# EAGLE board Q_Spec_Triad (EAGLE 7.7.0), part 1 of 2
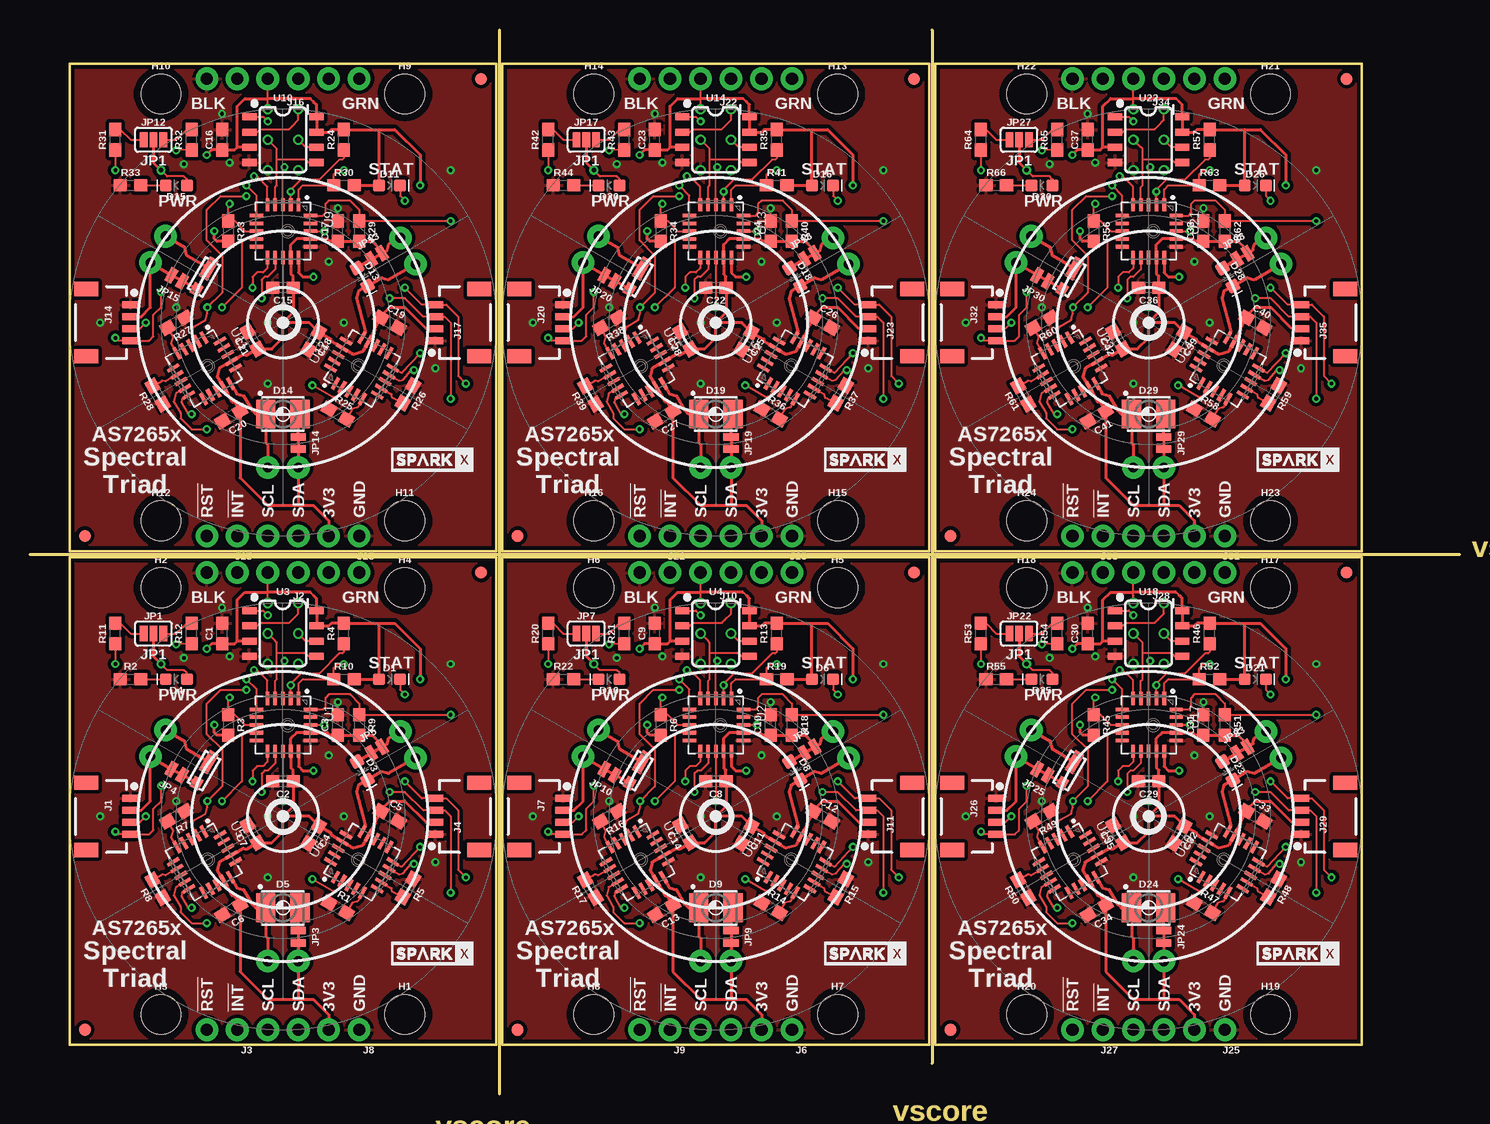
[diagram p0: board, top side]
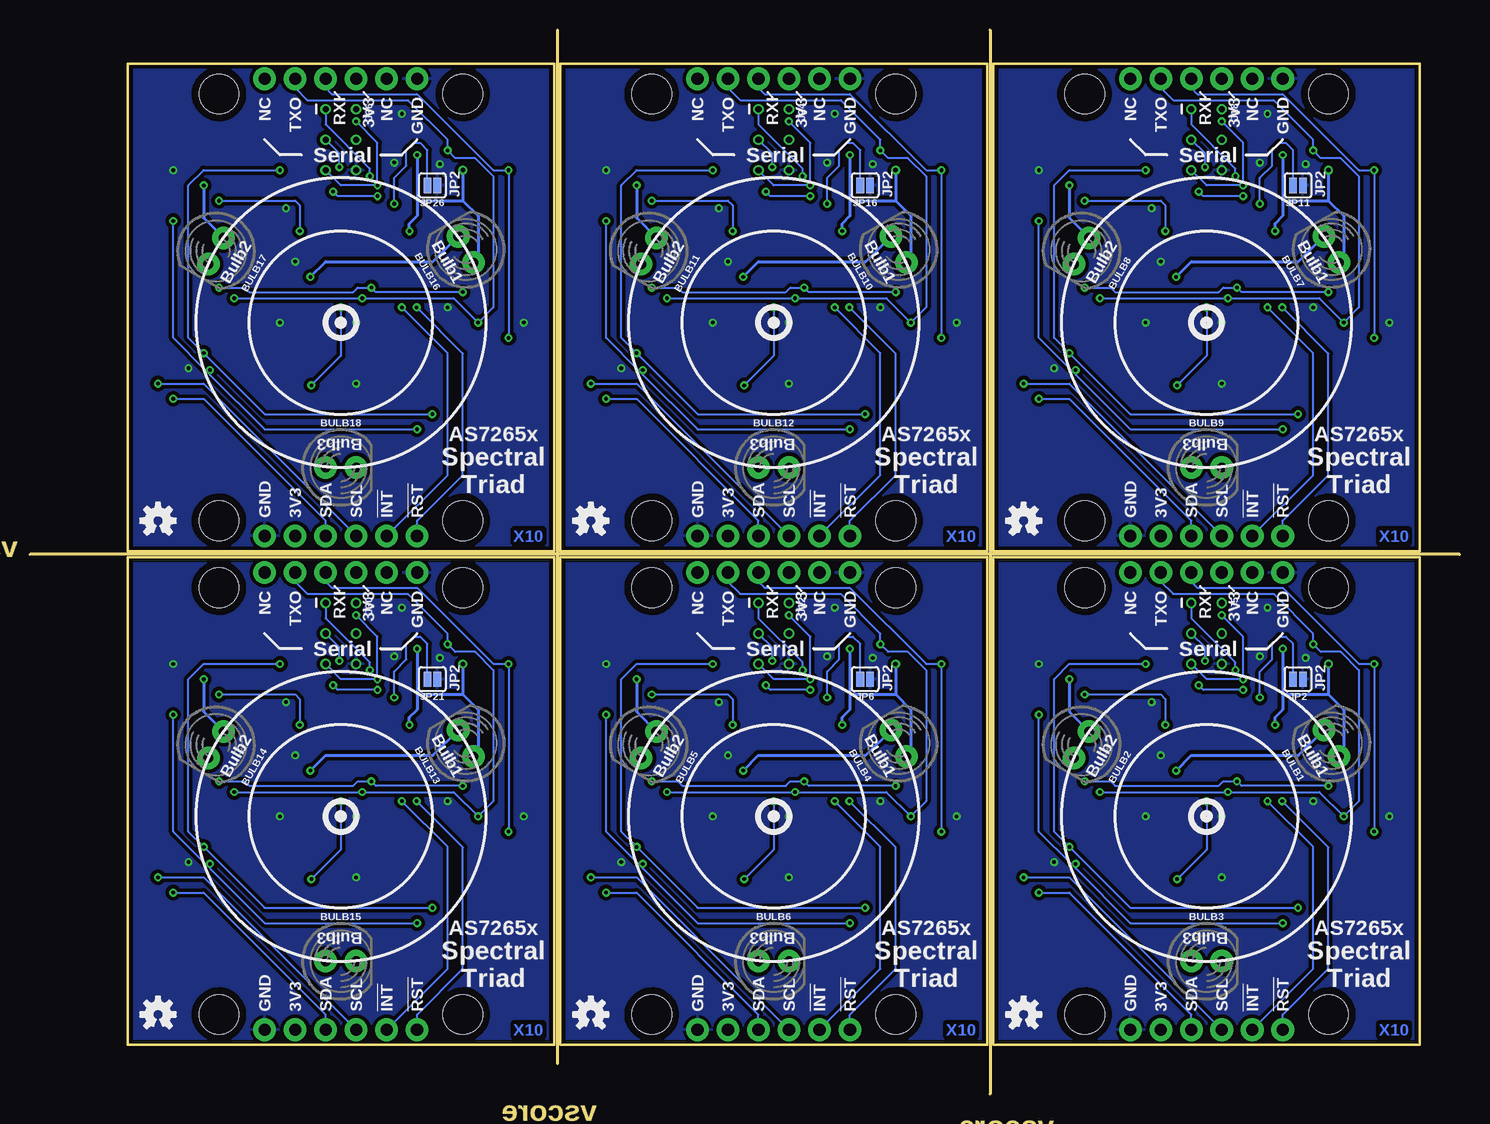
[diagram p1: board, bottom side, seen from below]

Size 119.13 x 88.65 mm. Coordinates in mm from the lower left corner, seen from the top.
Outline: 0,44.96 119.13,44.96
Outline: 75.18,88.65 75.18,2.54
Outline: 39.12,88.65 39.12,0
Outline: 3.3,4.06 3.3,44.7 38.86,44.7 38.86,4.06 3.3,4.06
Outline: 39.37,4.06 39.37,44.7 74.93,44.7 74.93,4.06 39.37,4.06
Outline: 3.3,45.21 3.3,85.85 38.86,85.85 38.86,45.21 3.3,45.21
Outline: 39.37,45.21 39.37,85.85 74.93,85.85 74.93,45.21 39.37,45.21
Outline: 75.44,4.06 75.44,44.7 111,44.7 111,4.06 75.44,4.06
Outline: 75.44,45.21 75.44,85.85 111,85.85 111,45.21 75.44,45.21
Copper layers (1*16): Top 0.035mm / dielectric 1.5mm / Bottom 0.035mm
Design rules "SparkFun-2-layer-PCBWay-LIMIT *": minimum track width 6mil, minimum drill 12mil, track to track 6mil, track to pad 6mil, pad to pad 6mil, via to via 6mil, smd to smd 6mil, copper to edge 6mil, drill to drill 6mil, minimum pad ring 7mil, minimum via ring 7mil, stop-mask expansion 4mil, vias tented up to drill 25mil, thermal gap 10mil

## Footprints (pad centres in the part's own frame; a part is rotated, then mirrored left to right if it is on the bottom)
LED_5MM_NOSILK = drill 0.813 pad 1.88: A -1.27,0; K 1.27,0
0603 = smd 1.1 x 1: 1 -0.85,0; 2 0.85,0
LED-0603 = smd 1 x 1: A -0.877,0; C 0.877,0
SUPER_BRIGHT_SMD_LED_1206 = smd 1 x 0.8: A -1.2,0 | smd 1.9 x 0.8: C 0.827,0
PLCC-2 = smd 1.6 x 2.4: 1 1.425,0; 2 -1.425,0
FIDUCIAL-1X2 = smd 1 x 1: 1 0,0
STAND-OFF = hole 3.302: 0,0
1X04_1MM_RA = smd 0.6 x 1.35: 1 -1.5,0; 2 -0.5,0; 3 0.5,0; 4 1.5,0 | smd 1.2 x 2: NC1 2.8,-3.675; NC2 -2.8,-3.675
1X06_NO_SILK = drill 1.016 pad 1.88: 1 0,0; 2 2.54,0; 3 5.08,0; 4 7.62,0; 5 10.16,0; 6 12.7,0
1X02_NO_SILK = drill 1.016 pad 1.88: 1 0,0; 2 2.54,0
2X3_TEST_POINTS = drill 0.508: 1 -2.54,-1.27; 2 -2.54,1.27; 3 0,-1.27; 4 0,1.27; 5 2.54,-1.27; 6 2.54,1.27
1X04_NO_SILK = drill 1.016 pad 1.88: 1 0,0; 2 2.54,0; 3 5.08,0; 4 7.62,0
SMT-JUMPER_3_2-NC_PASTE_SILK = smd 0.635 x 1.27: 1 -0.813,0; 2 0,0; 3 0.813,0
SMT-JUMPER_2_NO_SILK = smd 0.635 x 1.27: 1 -0.406,0; 2 0.406,0
SMT-JUMPER_2_NC_TRACE_NO-SILK = smd 0.635 x 1.27: 1 -0.508,0; 2 0.508,0
LGA20 = smd 1.1 x 0.3: 1 -2.2,1.3; 2 -2.2,0.65; 3 -2.2,0; 4 -2.2,-0.65; 5 -2.2,-1.3; 11 2.2,-1.3; 12 2.2,-0.65; 13 2.2,0; 14 2.2,0.65; 15 2.2,1.3 | smd 0.3 x 1.1: 6 -1.3,-2.2; 7 -0.65,-2.2; 8 0,-2.2; 9 0.65,-2.2; 10 1.3,-2.2; 16 1.3,2.3; 17 0.65,2.3; 18 0,2.3; 19 -0.65,2.3; 20 -1.3,2.3
SO08 = smd 0.6 x 1.2: 1 -1.905,-2.8; 2 -0.635,-2.8; 3 0.635,-2.8; 4 1.905,-2.8; 5 1.905,2.8; 6 0.635,2.8; 7 -0.635,2.8; 8 -1.905,2.8

## Placement (x,y rotation side)
BULB1  Incandescent  [LED_5MM_NOSILK]  10.67,29.21 120 bottom
BULB2  Incandescent  [LED_5MM_NOSILK]  31.5,29.08 240 bottom
BULB3  Incandescent  [LED_5MM_NOSILK]  21.08,11.05 0 bottom
BULB4  Incandescent  [LED_5MM_NOSILK]  46.74,29.21 120 bottom
BULB5  Incandescent  [LED_5MM_NOSILK]  67.56,29.08 240 bottom
BULB6  Incandescent  [LED_5MM_NOSILK]  57.15,11.05 0 bottom
BULB7  Incandescent  [LED_5MM_NOSILK]  10.67,70.36 120 bottom
BULB8  Incandescent  [LED_5MM_NOSILK]  31.5,70.23 240 bottom
BULB9  Incandescent  [LED_5MM_NOSILK]  21.08,52.2 0 bottom
BULB10  Incandescent  [LED_5MM_NOSILK]  46.74,70.36 120 bottom
BULB11  Incandescent  [LED_5MM_NOSILK]  67.56,70.23 240 bottom
BULB12  Incandescent  [LED_5MM_NOSILK]  57.15,52.2 0 bottom
BULB13  Incandescent  [LED_5MM_NOSILK]  82.8,29.21 120 bottom
BULB14  Incandescent  [LED_5MM_NOSILK]  103.63,29.08 240 bottom
BULB15  Incandescent  [LED_5MM_NOSILK]  93.22,11.05 0 bottom
BULB16  Incandescent  [LED_5MM_NOSILK]  82.8,70.36 120 bottom
BULB17  Incandescent  [LED_5MM_NOSILK]  103.63,70.23 240 bottom
BULB18  Incandescent  [LED_5MM_NOSILK]  93.22,52.2 0 bottom
C1  1.0uF  [0603]  16,38.35 90 top
C2  0.1uF  [0603]  21.08,26.03 180 top
C3  10uF  [0603]  25.65,30.73 90 top
C4  0.1uF  [0603]  23.62,21.59 240 top
C5  10uF  [0603]  29.97,23.11 330 top
C6  0.1uF  [0603]  16.77,15.32 210 top
C7  10uF  [0603]  18.55,21.65 120 top
C8  0.1uF  [0603]  57.15,26.03 180 top
C9  1.0uF  [0603]  52.07,38.35 90 top
C10  10uF  [0603]  61.72,30.73 90 top
C11  0.1uF  [0603]  59.69,21.59 240 top
C12  10uF  [0603]  66.04,23.11 330 top
C13  0.1uF  [0603]  52.84,15.32 210 top
C14  10uF  [0603]  54.62,21.65 120 top
C15  0.1uF  [0603]  21.08,67.18 180 top
C16  1.0uF  [0603]  16,79.5 90 top
C17  10uF  [0603]  25.65,71.88 90 top
C18  0.1uF  [0603]  23.62,62.74 240 top
C19  10uF  [0603]  29.97,64.26 330 top
C20  0.1uF  [0603]  16.77,56.47 210 top
C21  10uF  [0603]  18.55,62.8 120 top
C22  0.1uF  [0603]  57.15,67.18 180 top
C23  1.0uF  [0603]  52.07,79.5 90 top
C24  10uF  [0603]  61.72,71.88 90 top
C25  0.1uF  [0603]  59.69,62.74 240 top
C26  10uF  [0603]  66.04,64.26 330 top
C27  0.1uF  [0603]  52.84,56.47 210 top
C28  10uF  [0603]  54.62,62.8 120 top
C29  0.1uF  [0603]  93.22,26.03 180 top
C30  1.0uF  [0603]  88.14,38.35 90 top
C31  10uF  [0603]  97.79,30.73 90 top
C32  0.1uF  [0603]  95.76,21.59 240 top
C33  10uF  [0603]  102.11,23.11 330 top
C34  0.1uF  [0603]  88.91,15.32 210 top
C35  10uF  [0603]  90.69,21.65 120 top
C36  0.1uF  [0603]  93.22,67.18 180 top
C37  1.0uF  [0603]  88.14,79.5 90 top
C38  10uF  [0603]  97.79,71.88 90 top
C39  0.1uF  [0603]  95.76,62.74 240 top
C40  10uF  [0603]  102.11,64.26 330 top
C41  0.1uF  [0603]  88.91,56.47 210 top
C42  10uF  [0603]  90.69,62.8 120 top
D1  BLUE  [LED-0603]  29.97,34.54 0 top
D2  5700k  [SUPER_BRIGHT_SMD_LED_1206]  14.48,26.92 60 top
D3  IR  [LED-0603]  27.68,26.92 300 top
D4  RED  [LED-0603]  12.19,34.54 180 top
D5  UV  [PLCC-2]  21.08,15.49 0 top
D6  BLUE  [LED-0603]  66.04,34.54 0 top
D7  5700k  [SUPER_BRIGHT_SMD_LED_1206]  50.55,26.92 60 top
D8  IR  [LED-0603]  63.75,26.92 300 top
D9  UV  [PLCC-2]  57.15,15.49 0 top
D10  RED  [LED-0603]  48.26,34.54 180 top
D11  BLUE  [LED-0603]  29.97,75.69 0 top
D12  5700k  [SUPER_BRIGHT_SMD_LED_1206]  14.48,68.07 60 top
D13  IR  [LED-0603]  27.68,68.07 300 top
D14  UV  [PLCC-2]  21.08,56.64 0 top
D15  RED  [LED-0603]  12.19,75.69 180 top
D16  BLUE  [LED-0603]  66.04,75.69 0 top
D17  5700k  [SUPER_BRIGHT_SMD_LED_1206]  50.55,68.07 60 top
D18  IR  [LED-0603]  63.75,68.07 300 top
D19  UV  [PLCC-2]  57.15,56.64 0 top
D20  RED  [LED-0603]  48.26,75.69 180 top
D21  BLUE  [LED-0603]  102.11,34.54 0 top
D22  5700k  [SUPER_BRIGHT_SMD_LED_1206]  86.62,26.92 60 top
D23  IR  [LED-0603]  99.82,26.92 300 top
D24  UV  [PLCC-2]  93.22,15.49 0 top
D25  RED  [LED-0603]  84.33,34.54 180 top
D26  BLUE  [LED-0603]  102.11,75.69 0 top
D27  5700k  [SUPER_BRIGHT_SMD_LED_1206]  86.62,68.07 60 top
D28  IR  [LED-0603]  99.82,68.07 300 top
D29  UV  [PLCC-2]  93.22,56.64 0 top
D30  RED  [LED-0603]  84.33,75.69 180 top
FD1  FIDUCIAL1X2  [FIDUCIAL-1X2]  4.57,5.33 0 top
FD2  FIDUCIAL1X2  [FIDUCIAL-1X2]  37.59,43.43 0 top
FD3  FIDUCIAL1X2  [FIDUCIAL-1X2]  40.64,5.33 0 top
FD4  FIDUCIAL1X2  [FIDUCIAL-1X2]  73.66,43.43 0 top
FD5  FIDUCIAL1X2  [FIDUCIAL-1X2]  4.57,46.48 0 top
FD6  FIDUCIAL1X2  [FIDUCIAL-1X2]  37.59,84.58 0 top
FD7  FIDUCIAL1X2  [FIDUCIAL-1X2]  40.64,46.48 0 top
FD8  FIDUCIAL1X2  [FIDUCIAL-1X2]  73.66,84.58 0 top
FD9  FIDUCIAL1X2  [FIDUCIAL-1X2]  76.71,5.33 0 top
FD10  FIDUCIAL1X2  [FIDUCIAL-1X2]  109.73,43.43 0 top
FD11  FIDUCIAL1X2  [FIDUCIAL-1X2]  76.71,46.48 0 top
FD12  FIDUCIAL1X2  [FIDUCIAL-1X2]  109.73,84.58 0 top
H1  STAND-OFF  [STAND-OFF]  31.24,6.6 0 top
H2  STAND-OFF  [STAND-OFF]  10.92,42.16 0 top
H3  STAND-OFF  [STAND-OFF]  10.92,6.6 0 top
H4  STAND-OFF  [STAND-OFF]  31.24,42.16 0 top
H5  STAND-OFF  [STAND-OFF]  67.31,42.16 0 top
H6  STAND-OFF  [STAND-OFF]  46.99,42.16 0 top
H7  STAND-OFF  [STAND-OFF]  67.31,6.6 0 top
H8  STAND-OFF  [STAND-OFF]  46.99,6.6 0 top
H9  STAND-OFF  [STAND-OFF]  31.24,83.31 0 top
H10  STAND-OFF  [STAND-OFF]  10.92,83.31 0 top
H11  STAND-OFF  [STAND-OFF]  31.24,47.75 0 top
H12  STAND-OFF  [STAND-OFF]  10.92,47.75 0 top
H13  STAND-OFF  [STAND-OFF]  67.31,83.31 0 top
H14  STAND-OFF  [STAND-OFF]  46.99,83.31 0 top
H15  STAND-OFF  [STAND-OFF]  67.31,47.75 0 top
H16  STAND-OFF  [STAND-OFF]  46.99,47.75 0 top
H17  STAND-OFF  [STAND-OFF]  103.38,42.16 0 top
H18  STAND-OFF  [STAND-OFF]  83.06,42.16 0 top
H19  STAND-OFF  [STAND-OFF]  103.38,6.6 0 top
H20  STAND-OFF  [STAND-OFF]  83.06,6.6 0 top
H21  STAND-OFF  [STAND-OFF]  103.38,83.31 0 top
H22  STAND-OFF  [STAND-OFF]  83.06,83.31 0 top
H23  STAND-OFF  [STAND-OFF]  103.38,47.75 0 top
H24  STAND-OFF  [STAND-OFF]  83.06,47.75 0 top
J1  SMD  [1X04_1MM_RA]  8.38,23.11 270 top
J2  Serial Interface  [1X06_NO_SILK]  27.43,43.43 180 top
J3  [1X02_NO_SILK]  17.27,5.33 180 top
J4  SMD  [1X04_1MM_RA]  33.78,23.11 90 top
J5  Flash Programming  [2X3_TEST_POINTS]  21.08,38.35 270 bottom
J6  PTH  [1X04_NO_SILK]  63.5,5.33 180 top
J7  SMD  [1X04_1MM_RA]  44.45,23.11 270 top
J8  PTH  [1X04_NO_SILK]  27.43,5.33 180 top
J9  [1X02_NO_SILK]  53.34,5.33 180 top
J10  Serial Interface  [1X06_NO_SILK]  63.5,43.43 180 top
J11  SMD  [1X04_1MM_RA]  69.85,23.11 90 top
J12  Flash Programming  [2X3_TEST_POINTS]  57.15,38.35 270 bottom
J13  PTH  [1X04_NO_SILK]  27.43,46.48 180 top
J14  SMD  [1X04_1MM_RA]  8.38,64.26 270 top
J15  [1X02_NO_SILK]  17.27,46.48 180 top
J16  Serial Interface  [1X06_NO_SILK]  27.43,84.58 180 top
J17  SMD  [1X04_1MM_RA]  33.78,64.26 90 top
J18  Flash Programming  [2X3_TEST_POINTS]  21.08,79.5 270 bottom
J19  PTH  [1X04_NO_SILK]  63.5,46.48 180 top
J20  SMD  [1X04_1MM_RA]  44.45,64.26 270 top
J21  [1X02_NO_SILK]  53.34,46.48 180 top
J22  Serial Interface  [1X06_NO_SILK]  63.5,84.58 180 top
J23  SMD  [1X04_1MM_RA]  69.85,64.26 90 top
J24  Flash Programming  [2X3_TEST_POINTS]  57.15,79.5 270 bottom
J25  PTH  [1X04_NO_SILK]  99.57,5.33 180 top
J26  SMD  [1X04_1MM_RA]  80.52,23.11 270 top
J27  [1X02_NO_SILK]  89.41,5.33 180 top
J28  Serial Interface  [1X06_NO_SILK]  99.57,43.43 180 top
J29  SMD  [1X04_1MM_RA]  105.92,23.11 90 top
J30  Flash Programming  [2X3_TEST_POINTS]  93.22,38.35 270 bottom
J31  PTH  [1X04_NO_SILK]  99.57,46.48 180 top
J32  SMD  [1X04_1MM_RA]  80.52,64.26 270 top
J33  [1X02_NO_SILK]  89.41,46.48 180 top
J34  Serial Interface  [1X06_NO_SILK]  99.57,84.58 180 top
J35  SMD  [1X04_1MM_RA]  105.92,64.26 90 top
J36  Flash Programming  [2X3_TEST_POINTS]  93.22,79.5 270 bottom
JP1  [SMT-JUMPER_3_2-NC_PASTE_SILK]  10.29,38.35 0 top
JP2  [SMT-JUMPER_2_NO_SILK]  13.46,34.54 180 bottom
JP3  [SMT-JUMPER_2_NC_TRACE_NO-SILK]  22.35,13.08 270 top
JP4  [SMT-JUMPER_2_NC_TRACE_NO-SILK]  12.23,26.79 150 top
JP5  [SMT-JUMPER_2_NC_TRACE_NO-SILK]  28.89,28.65 30 top
JP6  [SMT-JUMPER_2_NO_SILK]  49.53,34.54 180 bottom
JP7  [SMT-JUMPER_3_2-NC_PASTE_SILK]  46.36,38.35 0 top
JP8  [SMT-JUMPER_2_NC_TRACE_NO-SILK]  64.95,28.65 30 top
JP9  [SMT-JUMPER_2_NC_TRACE_NO-SILK]  58.42,13.08 270 top
JP10  [SMT-JUMPER_2_NC_TRACE_NO-SILK]  48.3,26.79 150 top
JP11  [SMT-JUMPER_2_NO_SILK]  13.46,75.69 180 bottom
JP12  [SMT-JUMPER_3_2-NC_PASTE_SILK]  10.29,79.5 0 top
JP13  [SMT-JUMPER_2_NC_TRACE_NO-SILK]  28.89,69.79 30 top
JP14  [SMT-JUMPER_2_NC_TRACE_NO-SILK]  22.35,54.23 270 top
JP15  [SMT-JUMPER_2_NC_TRACE_NO-SILK]  12.23,67.94 150 top
JP16  [SMT-JUMPER_2_NO_SILK]  49.53,75.69 180 bottom
JP17  [SMT-JUMPER_3_2-NC_PASTE_SILK]  46.36,79.5 0 top
JP18  [SMT-JUMPER_2_NC_TRACE_NO-SILK]  64.95,69.79 30 top
JP19  [SMT-JUMPER_2_NC_TRACE_NO-SILK]  58.42,54.23 270 top
JP20  [SMT-JUMPER_2_NC_TRACE_NO-SILK]  48.3,67.94 150 top
JP21  [SMT-JUMPER_2_NO_SILK]  85.6,34.54 180 bottom
JP22  [SMT-JUMPER_3_2-NC_PASTE_SILK]  82.42,38.35 0 top
JP23  [SMT-JUMPER_2_NC_TRACE_NO-SILK]  101.02,28.65 30 top
JP24  [SMT-JUMPER_2_NC_TRACE_NO-SILK]  94.49,13.08 270 top
JP25  [SMT-JUMPER_2_NC_TRACE_NO-SILK]  84.37,26.79 150 top
JP26  [SMT-JUMPER_2_NO_SILK]  85.6,75.69 180 bottom
JP27  [SMT-JUMPER_3_2-NC_PASTE_SILK]  82.42,79.5 0 top
JP28  [SMT-JUMPER_2_NC_TRACE_NO-SILK]  101.02,69.79 30 top
JP29  [SMT-JUMPER_2_NC_TRACE_NO-SILK]  94.49,54.23 270 top
JP30  [SMT-JUMPER_2_NC_TRACE_NO-SILK]  84.37,67.94 150 top
LOGO1  OSHW-LOGOS  [OSHW-LOGO-S]  72.39,6.6 0 bottom
LOGO2  OSHW-LOGOS  [OSHW-LOGO-S]  36.32,47.75 0 bottom
LOGO3  OSHW-LOGOS  [OSHW-LOGO-S]  72.39,47.75 0 bottom
LOGO4  OSHW-LOGOS  [OSHW-LOGO-S]  36.32,6.6 0 bottom
LOGO5  OSHW-LOGOS  [OSHW-LOGO-S]  108.46,6.6 0 bottom
LOGO6  OSHW-LOGOS  [OSHW-LOGO-S]  108.46,47.75 0 bottom
R1  10k  [0603]  25.65,15.49 330 top
R2  1k  [0603]  8.38,34.54 0 top
R3  10k  [0603]  16.51,30.73 270 top
R4  10k  [0603]  26.16,38.35 90 top
R5  10k  [0603]  31.5,17.14 240 top
R6  10k  [0603]  52.58,30.73 270 top
R7  10k  [0603]  12.19,23.11 210 top
R8  10k  [0603]  10.63,17.08 120 top
R9  2.2k  [0603]  27.43,30.73 270 top
R10  2.2k  [0603]  26.16,34.54 0 top
R11  2.2k  [0603]  7.11,38.35 90 top
R12  2.2k  [0603]  13.46,38.35 90 top
R13  10k  [0603]  62.23,38.35 90 top
R14  10k  [0603]  61.72,15.49 330 top
R15  10k  [0603]  67.56,17.14 240 top
R16  10k  [0603]  48.26,23.11 210 top
R17  10k  [0603]  46.7,17.08 120 top
R18  2.2k  [0603]  63.5,30.73 270 top
R19  2.2k  [0603]  62.23,34.54 0 top
R20  2.2k  [0603]  43.18,38.35 90 top
R21  2.2k  [0603]  49.53,38.35 90 top
R22  1k  [0603]  44.45,34.54 0 top
R23  10k  [0603]  16.51,71.88 270 top
R24  10k  [0603]  26.16,79.5 90 top
R25  10k  [0603]  25.65,56.64 330 top
R26  10k  [0603]  31.5,58.29 240 top
R27  10k  [0603]  12.19,64.26 210 top
R28  10k  [0603]  10.63,58.23 120 top
R29  2.2k  [0603]  27.43,71.88 270 top
R30  2.2k  [0603]  26.16,75.69 0 top
R31  2.2k  [0603]  7.11,79.5 90 top
R32  2.2k  [0603]  13.46,79.5 90 top
R33  1k  [0603]  8.38,75.69 0 top
R34  10k  [0603]  52.58,71.88 270 top
R35  10k  [0603]  62.23,79.5 90 top
R36  10k  [0603]  61.72,56.64 330 top
R37  10k  [0603]  67.56,58.29 240 top
R38  10k  [0603]  48.26,64.26 210 top
R39  10k  [0603]  46.7,58.23 120 top
R40  2.2k  [0603]  63.5,71.88 270 top
R41  2.2k  [0603]  62.23,75.69 0 top
R42  2.2k  [0603]  43.18,79.5 90 top
R43  2.2k  [0603]  49.53,79.5 90 top
R44  1k  [0603]  44.45,75.69 0 top
R45  10k  [0603]  88.65,30.73 270 top
R46  10k  [0603]  98.3,38.35 90 top
R47  10k  [0603]  97.79,15.49 330 top
R48  10k  [0603]  103.63,17.14 240 top
R49  10k  [0603]  84.33,23.11 210 top
R50  10k  [0603]  82.77,17.08 120 top
R51  2.2k  [0603]  99.57,30.73 270 top
R52  2.2k  [0603]  98.3,34.54 0 top
R53  2.2k  [0603]  79.25,38.35 90 top
R54  2.2k  [0603]  85.6,38.35 90 top
R55  1k  [0603]  80.52,34.54 0 top
R56  10k  [0603]  88.65,71.88 270 top
R57  10k  [0603]  98.3,79.5 90 top
R58  10k  [0603]  97.79,56.64 330 top
R59  10k  [0603]  103.63,58.29 240 top
R60  10k  [0603]  84.33,64.26 210 top
R61  10k  [0603]  82.77,58.23 120 top
R62  2.2k  [0603]  99.57,71.88 270 top
R63  2.2k  [0603]  98.3,75.69 0 top
R64  2.2k  [0603]  79.25,79.5 90 top
R65  2.2k  [0603]  85.6,79.5 90 top
R66  1k  [0603]  80.52,75.69 0 top
U1  AS72651  [LGA20]  21.08,30.73 270 top
U2  AS72651  [LGA20]  57.15,30.73 270 top
U3  4MB Flash  [SO08]  21.08,38.35 270 top
U4  4MB Flash  [SO08]  57.15,38.35 270 top
U5  AS72653  [LGA20]  14.48,19.3 300 top
U6  AS72652  [LGA20]  27.68,19.3 60 top
U7  AS72653  [LGA20]  50.55,19.3 300 top
U8  AS72652  [LGA20]  63.75,19.3 60 top
U9  AS72651  [LGA20]  21.08,71.88 270 top
U10  4MB Flash  [SO08]  21.08,79.5 270 top
U11  AS72653  [LGA20]  14.48,60.45 300 top
U12  AS72652  [LGA20]  27.68,60.45 60 top
U13  AS72651  [LGA20]  57.15,71.88 270 top
U14  4MB Flash  [SO08]  57.15,79.5 270 top
U15  AS72653  [LGA20]  50.55,60.45 300 top
U16  AS72652  [LGA20]  63.75,60.45 60 top
U17  AS72651  [LGA20]  93.22,30.73 270 top
U18  4MB Flash  [SO08]  93.22,38.35 270 top
U19  AS72653  [LGA20]  86.62,19.3 300 top
U20  AS72652  [LGA20]  99.82,19.3 60 top
U21  AS72651  [LGA20]  93.22,71.88 270 top
U22  4MB Flash  [SO08]  93.22,79.5 270 top
U23  AS72653  [LGA20]  86.62,60.45 300 top
U24  AS72652  [LGA20]  99.82,60.45 60 top
U$1  SPARKX-LOGO3  [SPARKX-SMALL]  33.53,11.68 0 top
U$2  SPARKX-LOGO3  [SPARKX-SMALL]  69.6,11.68 0 top
U$3  SPARKX-LOGO3  [SPARKX-SMALL]  33.53,52.83 0 top
U$4  SPARKX-LOGO3  [SPARKX-SMALL]  69.6,52.83 0 top
U$5  SPARKX-LOGO3  [SPARKX-SMALL]  105.66,11.68 0 top
U$6  SPARKX-LOGO3  [SPARKX-SMALL]  105.66,52.83 0 top

## Library data of the parts
BULB1-BULB18 D2 D5 D7 D9 D12 D14 D17 D19 D22 D24 D27 D29 J1 J4 J7 J11 J14 J17 J20 J23 J26 J29 J32 J35 U$1-U$6 = SparkX
C1 C9 C16 C23 C30 C37 = SparkFun-Capacitors; PROD_ID: CAP-00868
C2 C4 C6 C8 C11 C13 C15 C18 C20 C22 C25 C27 C29 C32 C34 C36 C39 C41 = SparkFun-Capacitors; PROD_ID: CAP-00810
C3 C5 C7 C10 C12 C14 C17 C19 C21 C24 C26 C28 C31 C33 C35 C38 C40 C42 = SparkFun-Capacitors; PROD_ID: CAP-11015
D1 D6 D11 D16 D21 D26 = SparkFun-LED; PROD_ID: DIO-08575
D3 D8 D13 D18 D23 D28 = SparkFun-LED
D4 D10 D15 D20 D25 D30 = SparkFun-LED; PROD_ID: DIO-00819
FD1-FD12 LOGO1-LOGO6 = SparkFun-Aesthetics
H1-H24 = SparkFun-Hardware
J2 J10 J16 J22 J28 J34 = SparkFun-Connectors; PROD_ID: CONN-08437
J3 J5 J6 J8 J9 J12 J13 J15 J18 J19 J21 J24 J25 J27 J30 J31 J33 J36 = SparkFun-Connectors
JP1-JP30 = SparkFun-Jumpers
R1 R3-R8 R13-R17 R23-R28 R34-R39 R45-R50 R56-R61 = SparkFun-Resistors; PROD_ID: RES-00824
R2 R22 R33 R44 R55 R66 = SparkFun-Resistors; PROD_ID: RES-07856
R9-R12 R18-R21 R29-R32 R40-R43 R51-R54 R62-R65 = SparkFun-Resistors; PROD_ID: RES-08272
U1 U2 U5-U9 U11-U13 U15-U17 U19-U21 U23 U24 = AS7265x
U3 U4 U10 U14 U18 U22 = SparkFun-IC-Memory; PROD_ID: IC-12455

## Nets
3.3V: BULB1.A BULB2.A BULB3.A C1.1 C2.1 C3.1 C4.1 C5.1 C6.1 C7.1 D1.A D4.A J1.2 J2.4 J4.2 J5.2 J8.2 JP1.2 JP3.2 JP4.2 JP5.2 R3.2 R4.2 R9.2 R10.2 U1.14 U1.17 U3.3 U3.7 U3.8 U5.14 U5.17 U6.14 U6.17
3.3V1: BULB4.A BULB5.A BULB6.A C8.1 C9.1 C10.1 C11.1 C12.1 C13.1 C14.1 D6.A D10.A J6.2 J7.2 J10.4 J11.2 J12.2 JP7.2 JP8.2 JP9.2 JP10.2 R6.2 R13.2 R18.2 R19.2 U2.14 U2.17 U4.3 U4.7 U4.8 U7.14 U7.17 U8.14 U8.17
3.3V2: BULB7.A BULB8.A BULB9.A C15.1 C16.1 C17.1 C18.1 C19.1 C20.1 C21.1 D11.A D15.A J13.2 J14.2 J16.4 J17.2 J18.2 JP12.2 JP13.2 JP14.2 JP15.2 R23.2 R24.2 R29.2 R30.2 U9.14 U9.17 U10.3 U10.7 U10.8 U11.14 U11.17 U12.14 U12.17
3.3V3: BULB10.A BULB11.A BULB12.A C22.1 C23.1 C24.1 C25.1 C26.1 C27.1 C28.1 D16.A D20.A J19.2 J20.2 J22.4 J23.2 J24.2 JP17.2 JP18.2 JP19.2 JP20.2 R34.2 R35.2 R40.2 R41.2 U13.14 U13.17 U14.3 U14.7 U14.8 U15.14 U15.17 U16.14 U16.17
3.3V4: BULB13.A BULB14.A BULB15.A C29.1 C30.1 C31.1 C32.1 C33.1 C34.1 C35.1 D21.A D25.A J25.2 J26.2 J28.4 J29.2 J30.2 JP22.2 JP23.2 JP24.2 JP25.2 R45.2 R46.2 R51.2 R52.2 U17.14 U17.17 U18.3 U18.7 U18.8 U19.14 U19.17 U20.14 U20.17
3.3V5: BULB16.A BULB17.A BULB18.A C36.1 C37.1 C38.1 C39.1 C40.1 C41.1 C42.1 D26.A D30.A J31.2 J32.2 J34.4 J35.2 J36.2 JP27.2 JP28.2 JP29.2 JP30.2 R56.2 R57.2 R62.2 R63.2 U21.14 U21.17 U22.3 U22.7 U22.8 U23.14 U23.17 U24.14 U24.17
!CS_EE: J5.5 U1.6 U3.1
!CS_EE1: J12.5 U2.6 U4.1
!CS_EE2: J18.5 U9.6 U10.1
!CS_EE3: J24.5 U13.6 U14.1
!CS_EE4: J30.5 U17.6 U18.1
!CS_EE5: J36.5 U21.6 U22.1
!INT: J3.1 U1.9
!INT1: J9.1 U2.9
!INT2: J15.1 U9.9
!INT3: J21.1 U13.9
!INT4: J27.1 U17.9
!INT5: J33.1 U21.9
!RST: J3.2 R4.1 U1.2 U5.2
!RST1: J9.2 R13.1 U2.2 U7.2
!RST2: J15.2 R24.1 U9.2 U11.2
!RST3: J21.2 R35.1 U13.2 U15.2
!RST4: J27.2 R46.1 U17.2 U19.2
!RST5: J33.2 R57.1 U21.2 U23.2
!RST-ADDR: U1.13 U6.2
!RST-ADDR1: U2.13 U8.2
!RST-ADDR2: U9.13 U12.2
!RST-ADDR3: U13.13 U16.2
!RST-ADDR4: U17.13 U20.2
!RST-ADDR5: U21.13 U24.2
GND: C1.2 C2.2 C3.2 C4.2 C5.2 C6.2 C7.2 J1.1 J2.6 J4.1 J5.6 J8.1 JP2.1 R1.1 R2.1 R5.1 R7.1 R8.1 U1.16 U3.4 U5.16 U6.16
GND1: C8.2 C9.2 C10.2 C11.2 C12.2 C13.2 C14.2 J6.1 J7.1 J10.6 J11.1 J12.6 JP6.1 R14.1 R15.1 R16.1 R17.1 R22.1 U2.16 U4.4 U7.16 U8.16
GND2: C15.2 C16.2 C17.2 C18.2 C19.2 C20.2 C21.2 J13.1 J14.1 J16.6 J17.1 J18.6 JP11.1 R25.1 R26.1 R27.1 R28.1 R33.1 U9.16 U10.4 U11.16 U12.16
GND3: C22.2 C23.2 C24.2 C25.2 C26.2 C27.2 C28.2 J19.1 J20.1 J22.6 J23.1 J24.6 JP16.1 R36.1 R37.1 R38.1 R39.1 R44.1 U13.16 U14.4 U15.16 U16.16
GND4: C29.2 C30.2 C31.2 C32.2 C33.2 C34.2 C35.2 J25.1 J26.1 J28.6 J29.1 J30.6 JP21.1 R47.1 R48.1 R49.1 R50.1 R55.1 U17.16 U18.4 U19.16 U20.16
GND5: C36.2 C37.2 C38.2 C39.2 C40.2 C41.2 C42.2 J31.1 J32.1 J34.6 J35.1 J36.6 JP26.1 R58.1 R59.1 R60.1 R61.1 R66.1 U21.16 U22.4 U23.16 U24.16
I2C_ENB: JP2.2 R3.1 U1.8
I2C_ENB1: JP6.2 R6.1 U2.8
I2C_ENB2: JP11.2 R23.1 U9.8
I2C_ENB3: JP16.2 R34.1 U13.8
I2C_ENB4: JP21.2 R45.1 U17.8
I2C_ENB5: JP26.2 R56.1 U21.8
LED_DRV: BULB1.K D2.C U1.15
LED_DRV1: BULB2.K D3.C U6.15
LED_DRV2: BULB3.K D5.2 U5.15
LED_DRV3: BULB4.K D7.C U2.15
LED_DRV4: BULB5.K D8.C U8.15
LED_DRV5: BULB6.K D9.2 U7.15
LED_DRV6: BULB7.K D12.C U9.15
LED_DRV7: BULB8.K D13.C U12.15
LED_DRV8: BULB9.K D14.2 U11.15
LED_DRV9: BULB10.K D17.C U13.15
LED_DRV10: BULB11.K D18.C U16.15
LED_DRV11: BULB12.K D19.2 U15.15
LED_DRV12: BULB13.K D22.C U17.15
LED_DRV13: BULB14.K D23.C U20.15
LED_DRV14: BULB15.K D24.2 U19.15
LED_DRV15: BULB16.K D27.C U21.15
LED_DRV16: BULB17.K D28.C U24.15
LED_DRV17: BULB18.K D29.2 U23.15
MISO: J5.1 U1.5 U3.2
MISO1: J12.1 U2.5 U4.2
MISO2: J18.1 U9.5 U10.2
MISO3: J24.1 U13.5 U14.2
MISO4: J30.1 U17.5 U18.2
MISO5: J36.1 U21.5 U22.2
MOSI: J5.4 U1.4 U3.5
MOSI1: J12.4 U2.4 U4.5
MOSI2: J18.4 U9.4 U10.5
MOSI3: J24.4 U13.4 U14.5
MOSI4: J30.4 U17.4 U18.5
MOSI5: J36.4 U21.4 U22.5
N$1: D4.C R2.2
N$2: D1.C U1.18
N$3: R5.2 U6.7
N$4: JP1.3 R12.2
N$5: JP1.1 R11.2
N$6: D2.A JP4.1
N$7: JP7.3 R21.2
N$8: D3.A JP5.1
N$9: R1.2 U6.5
N$10: JP7.1 R20.2
N$11: D5.1 JP3.1
N$12: R8.2 U5.7
N$13: R7.2 U5.5
N$14: D6.C U2.18
N$15: D7.A JP10.1
N$16: D8.A JP8.1
N$17: R15.2 U8.7
N$18: R14.2 U8.5
N$19: D9.1 JP9.1
N$20: R17.2 U7.7
N$21: R16.2 U7.5
N$22: D10.C R22.2
N$23: JP12.3 R32.2
N$24: JP12.1 R31.2
N$25: D11.C U9.18
N$26: D12.A JP15.1
N$27: D13.A JP13.1
N$28: R26.2 U12.7
N$29: R25.2 U12.5
N$30: D14.1 JP14.1
N$31: R28.2 U11.7
N$32: R27.2 U11.5
N$33: D15.C R33.2
N$34: JP17.3 R43.2
N$35: JP17.1 R42.2
N$36: D16.C U13.18
N$37: D17.A JP20.1
N$38: D18.A JP18.1
N$39: R37.2 U16.7
N$40: R36.2 U16.5
N$41: D19.1 JP19.1
N$42: R39.2 U15.7
N$43: R38.2 U15.5
N$44: D20.C R44.2
N$45: JP22.3 R54.2
N$46: JP22.1 R53.2
N$47: D21.C U17.18
N$48: D22.A JP25.1
N$49: D23.A JP23.1
N$50: R48.2 U20.7
N$51: R47.2 U20.5
N$52: D24.1 JP24.1
N$53: R50.2 U19.7
N$54: R49.2 U19.5
N$55: D25.C R55.2
N$56: JP27.3 R65.2
N$57: JP27.1 R64.2
N$58: D26.C U21.18
N$59: D27.A JP30.1
N$60: D28.A JP28.1
N$61: R59.2 U24.7
N$62: R58.2 U24.5
N$63: D29.1 JP29.1
N$64: R61.2 U23.7
N$65: R60.2 U23.5
N$66: D30.C R66.2
RX/SCL: J1.4 J2.3 J4.4 J8.4 R11.1 U1.11
RX/SCL1: J6.4 J7.4 J10.3 J11.4 R20.1 U2.11
RX/SCL2: J13.4 J14.4 J16.3 J17.4 R31.1 U9.11
RX/SCL3: J19.4 J20.4 J22.3 J23.4 R42.1 U13.11
RX/SCL4: J25.4 J26.4 J28.3 J29.4 R53.1 U17.11
RX/SCL5: J31.4 J32.4 J34.3 J35.4 R64.1 U21.11
SCK: J5.3 U1.3 U3.6
SCK1: J12.3 U2.3 U4.6
SCK2: J18.3 U9.3 U10.6
SCK3: J24.3 U13.3 U14.6
SCK4: J30.3 U17.3 U18.6
SCK5: J36.3 U21.3 U22.6
SCL_S: R9.1 U1.20 U5.9 U6.9
SCL_S1: R18.1 U2.20 U7.9 U8.9
SCL_S2: R29.1 U9.20 U11.9 U12.9
SCL_S3: R40.1 U13.20 U15.9 U16.9
SCL_S4: R51.1 U17.20 U19.9 U20.9
SCL_S5: R62.1 U21.20 U23.9 U24.9
SDA_S: R10.1 U1.1 U5.10 U6.10
SDA_S1: R19.1 U2.1 U7.10 U8.10
SDA_S2: R30.1 U9.1 U11.10 U12.10
SDA_S3: R41.1 U13.1 U15.10 U16.10
SDA_S4: R52.1 U17.1 U19.10 U20.10
SDA_S5: R63.1 U21.1 U23.10 U24.10
TX/SDA: J1.3 J2.2 J4.3 J8.3 R12.1 U1.12
TX/SDA1: J6.3 J7.3 J10.2 J11.3 R21.1 U2.12
TX/SDA2: J13.3 J14.3 J16.2 J17.3 R32.1 U9.12
TX/SDA3: J19.3 J20.3 J22.2 J23.3 R43.1 U13.12
TX/SDA4: J25.3 J26.3 J28.2 J29.3 R54.1 U17.12
TX/SDA5: J31.3 J32.3 J34.2 J35.3 R65.1 U21.12